# EAGLE board Copy of Home Automation Using Arduino UNO (EAGLE 9.7.0)

Size 205.05 x 157.31 mm. Coordinates in mm from the lower left corner, seen from the top.
Outline: 0,0 205.05,0 205.05,157.31 0,157.31 0,0
Copper layers (1*16): Top 0.035mm / dielectric 1.5mm / Bottom 0.035mm
Design rules "default": minimum track width 6mil, minimum drill 0.35mm, track to track 6mil, track to pad 6mil, pad to pad 6mil, via to via 6mil, smd to smd 6mil, copper to edge 40mil, drill to drill 6mil, minimum pad ring 10mil, minimum via ring 8mil, stop-mask expansion 4mil, vias tented up to drill 0mil, thermal gap 10mil

## Footprints (pad centres in the part's own frame; a part is rotated, then mirrored left to right if it is on the bottom)
BATTERY-GENERIC = drill 1.118 pad 3.15 octagon: + 2.54,0; - -2.54,0
DIODE-AXIAL = drill 1: 1 -5.08,0; 2 5.08,0
LEDRD254W60D565H860B_Y = drill 0.981 pad 1.581: 1 -1.27,0; 2 1.27,0
LEDRD254W60D565H860B_B = drill 0.981 pad 1.581: 1 -1.27,0; 2 1.27,0
LEDRD254W60D565H860B_W = drill 0.981 pad 1.581: 1 -1.27,0; 2 1.27,0
LEDRD254W60D565H860B_G = drill 0.981 pad 1.581: 1 -1.27,0; 2 1.27,0
LEDRD254W60D565H860B = drill 0.981 pad 1.581: 1 -1.27,0; 2 1.27,0
MOTOR = drill 1.118 pad 3.15 octagon: + 2.54,0; - -2.54,0
RESAD1016W63L850D250B = drill 0.83 pad 1.43: 1 -5.08,0; 2 5.08,0
HA-06-SM065 = drill 1 pad 1.676: 1 -2.54,-2.54; 2 0,2.54; 3 2.54,-2.54
TO92 = drill 0.813 octagon: 1 -1.27,0; 2 0,1.905; 3 1.27,0
ARDUINO-UNO-R3-SHIELD = drill 1.016 pad 1.88: 3.3V 24.13,-2.54; 5V 24.13,0; A0 24.13,12.7; A1 24.13,15.24; A2 24.13,17.78; A3 24.13,20.32; A4 24.13,22.86; A5 24.13,25.4; AREF -24.13,-13.97; D2 -24.13,20.32; D3 -24.13,17.78; D4 -24.13,15.24; D5 -24.13,12.7; D6 -24.13,10.16; D7 -24.13,7.62; D8 -24.13,3.81; D9 -24.13,1.27; D10 -24.13,-1.27; D11 -24.13,-3.81; D12 -24.13,-6.35; D13 -24.13,-8.89; GND@0 24.13,2.54; GND@1 24.13,5.08; GND@2 -24.13,-11.43; IOREF 24.13,-7.62; NC 24.13,-10.16; RES 24.13,-5.08; RX -24.13,25.4; SCL -24.13,-19.05; SDA -24.13,-16.51; TX -24.13,22.86; VIN 24.13,7.62
TSOP48 = drill 0.8: 1 -2.54,0; 2 0,0; 3 2.54,0
DIP762W53P254L1969H508Q16B = drill 0.743 pad 1.343: 1 -3.81,8.89; 2 -3.81,6.35; 3 -3.81,3.81; 4 -3.81,1.27; 5 -3.81,-1.27; 6 -3.81,-3.81; 7 -3.81,-6.35; 8 -3.81,-8.89; 9 3.81,-8.89; 10 3.81,-6.35; 11 3.81,-3.81; 12 3.81,-1.27; 13 3.81,1.27; 14 3.81,3.81; 15 3.81,6.35; 16 3.81,8.89
JHD-162A = drill 1.016 long: 1 -19.05,0; 2 -16.51,0; 3 -13.97,0; 4 -11.43,0; 5 -8.89,0; 6 -6.35,0; 7 -3.81,0; 8 -1.27,0; 9 1.27,0; 10 3.81,0; 11 6.35,0; 12 8.89,0; 13 11.43,0; 14 13.97,0; 15 16.51,0; 16 19.05,0

## Placement (x,y rotation side)
BAT1  9V  [BATTERY-GENERIC]  101.03,110.05 180 top
BAT2  9V  [BATTERY-GENERIC]  175.99,81.45 90 top
D1  DIODEDIODE-AXIAL  [DIODE-AXIAL]  77.81,135.97 270 top
DAIR_CONDITIONER  YELLOW  [LEDRD254W60D565H860B_Y]  38.44,133.43 180 top
DCHARGER_PORT_1  BLUE  [LEDRD254W60D565H860B_B]  53.68,133.43 180 top
DFAN  WHITE  [LEDRD254W60D565H860B_W]  61.3,133.43 180 top
DMUSIC_SYSTEM  GREEN  [LEDRD254W60D565H860B_G]  46.06,133.43 180 top
DTELEVISION  RED  [LEDRD254W60D565H860B]  30.82,133.43 180 top
MDOUBLE_MOTORS_1  MOTOR_HDR  [MOTOR]  131.11,122.55 0 top
MDOUBLE_MOTORS_2  MOTOR_HDR  [MOTOR]  196.8,123.08 0 top
MFAN  MOTOR_HDR  [MOTOR]  92.67,146.41 270 top
R1  220  [RESAD1016W63L850D250B]  37.17,120.73 90 top
R2  220  [RESAD1016W63L850D250B]  44.79,120.73 90 top
R3  220  [RESAD1016W63L850D250B]  52.41,120.73 90 top
R4  220  [RESAD1016W63L850D250B]  60.03,120.73 90 top
R6  220  [RESAD1016W63L850D250B]  29.55,120.73 90 top
R7  2.2k  [RESAD1016W63L850D250B]  75.27,146.13 0 top
R9  220  [RESAD1016W63L850D250B]  50.9,28.83 90 top
RPOT3  250k  [HA-06-SM065]  33.12,8.51 0 top
T1  NPN  [TO92]  80.35,151.21 0 top
U1  ARDUINO-UNO-R3-SHIELD  [ARDUINO-UNO-R3-SHIELD]  47.88,72.39 270 top
U2  IR-RECEIVERTSOP48  [TSOP48]  14.31,133.43 0 top
U4  L293E  [DIP762W53P254L1969H508Q16B]  164.35,121.28 0 top
U5  LCD-16X2JHD-162A  [JHD-162A]  132.24,36.63 0 top

## Library data of the parts
BAT1 BAT2 D1 MDOUBLE_MOTORS_1 MDOUBLE_MOTORS_2 MFAN R1-R4 R6 R7 R9 RPOT3 U1 U2 U4 U5 = Tinkercad
DAIR_CONDITIONER = Tinkercad; CATEGORY: Opto-Electronic; SUB-CATEGORY: LED; VALUE: LED_YELLOW
DCHARGER_PORT_1 = Tinkercad; CATEGORY: Opto-Electronic; SUB-CATEGORY: LED; VALUE: LED_BLUE
DFAN = Tinkercad; CATEGORY: Opto-Electronic; SUB-CATEGORY: LED; VALUE: LED_WHITE
DMUSIC_SYSTEM = Tinkercad; CATEGORY: Opto-Electronic; SUB-CATEGORY: LED; VALUE: LED_GREEN
DTELEVISION = Tinkercad; CATEGORY: Opto-Electronic; SUB-CATEGORY: LED; VALUE: LED_RED
T1 = Tinkercad; CATEGORY: Transistor; SUB-CATEGORY: BJT; TYPE: NPN

## Nets
BAT1+: BAT1.+ MFAN.+
BAT1-: BAT1.- BAT2.- R1.1 R2.1 R3.1 R4.1 R6.1 RPOT3.3 T1.3 U1.GND@0 U1.GND@1 U1.GND@2 U2.2 U4.4 U4.5 U4.12 U4.13 U5.1 U5.5 U5.16
BAT2+: BAT2.+ R9.2 RPOT3.1 U1.5V U2.3 U4.1 U4.8 U4.9 U4.16 U5.2
DAIR_CONDITIONER_C: DAIR_CONDITIONER.2 R1.2
DCHARGER_PORT_1_C: DCHARGER_PORT_1.2 R3.2
DFAN_C: DFAN.2 R4.2
DMUSIC_SYSTEM_C: DMUSIC_SYSTEM.2 R2.2
DTELEVISION_C: DTELEVISION.2 R6.2
MDOUBLE_MOTORS_1_+: MDOUBLE_MOTORS_1.+ U4.6
MDOUBLE_MOTORS_1_-: MDOUBLE_MOTORS_1.- U4.3
MDOUBLE_MOTORS_2_+: MDOUBLE_MOTORS_2.+ U4.14
MDOUBLE_MOTORS_2_-: MDOUBLE_MOTORS_2.- U4.11
MFAN_-: D1.1 MFAN.- T1.1
T1_B: R7.2 T1.2
U1_A0: U1.A0 U5.4
U1_A1: U1.A1 U5.6
U1_A2: U1.A2 U5.14
U1_A3: U1.A3 U5.13
U1_A4: U1.A4 U5.12
U1_A5: U1.A5 U5.11
U1_D2: U1.D2 U4.10
U1_D3: U1.D3 U4.15
U1_D4: U1.D4 U4.2
U1_D5: U1.D5 U4.7
U1_D6: R7.1 U1.D6
U1_D7: DFAN.1 U1.D7
U1_D8: DCHARGER_PORT_1.1 U1.D8
U1_D9: DMUSIC_SYSTEM.1 U1.D9
U1_D10: DAIR_CONDITIONER.1 U1.D10
U1_D11: U1.D11 U2.1
U1_D12: DTELEVISION.1 U1.D12
U5_LED+: R9.1 U5.15
U5_VO: RPOT3.2 U5.3

## Tracks (layer width: path | path; a pad name or v marks a point on that pad's centre or on a via)
BAT1+  (1 unrouted)
BAT1-  (19 unrouted)
BAT2+  (9 unrouted)
DAIR_CONDITIONER_C  (1 unrouted)
DCHARGER_PORT_1_C  (1 unrouted)
DFAN_C  (1 unrouted)
DMUSIC_SYSTEM_C  (1 unrouted)
DTELEVISION_C  (1 unrouted)
MDOUBLE_MOTORS_1_+  (1 unrouted)
MDOUBLE_MOTORS_1_-  (1 unrouted)
MDOUBLE_MOTORS_2_+  (1 unrouted)
MDOUBLE_MOTORS_2_-  (1 unrouted)
MFAN_-  (2 unrouted)
T1_B  (1 unrouted)
U1_A0  (1 unrouted)
U1_A1  (1 unrouted)
U1_A2  (1 unrouted)
U1_A3  (1 unrouted)
U1_A4  (1 unrouted)
U1_A5  (1 unrouted)
U1_D2  (1 unrouted)
U1_D3  (1 unrouted)
U1_D4  (1 unrouted)
U1_D5  (1 unrouted)
U1_D6  (1 unrouted)
U1_D7  (1 unrouted)
U1_D8  (1 unrouted)
U1_D9  (1 unrouted)
U1_D10  (1 unrouted)
U1_D11  (1 unrouted)
U1_D12  (1 unrouted)
U5_LED+  (1 unrouted)
U5_VO  (1 unrouted)